# Altium PCB DesafioHardware.PcbDoc
Units mm, origin at the board's own origin, x right, y up, seen from the top; angles counter-clockwise.
Board outline 104 x 72.5 mm, 2 copper layers (Top Layer, Bottom Layer); 27 components, 23 nets, 140 pads, 77 vias.
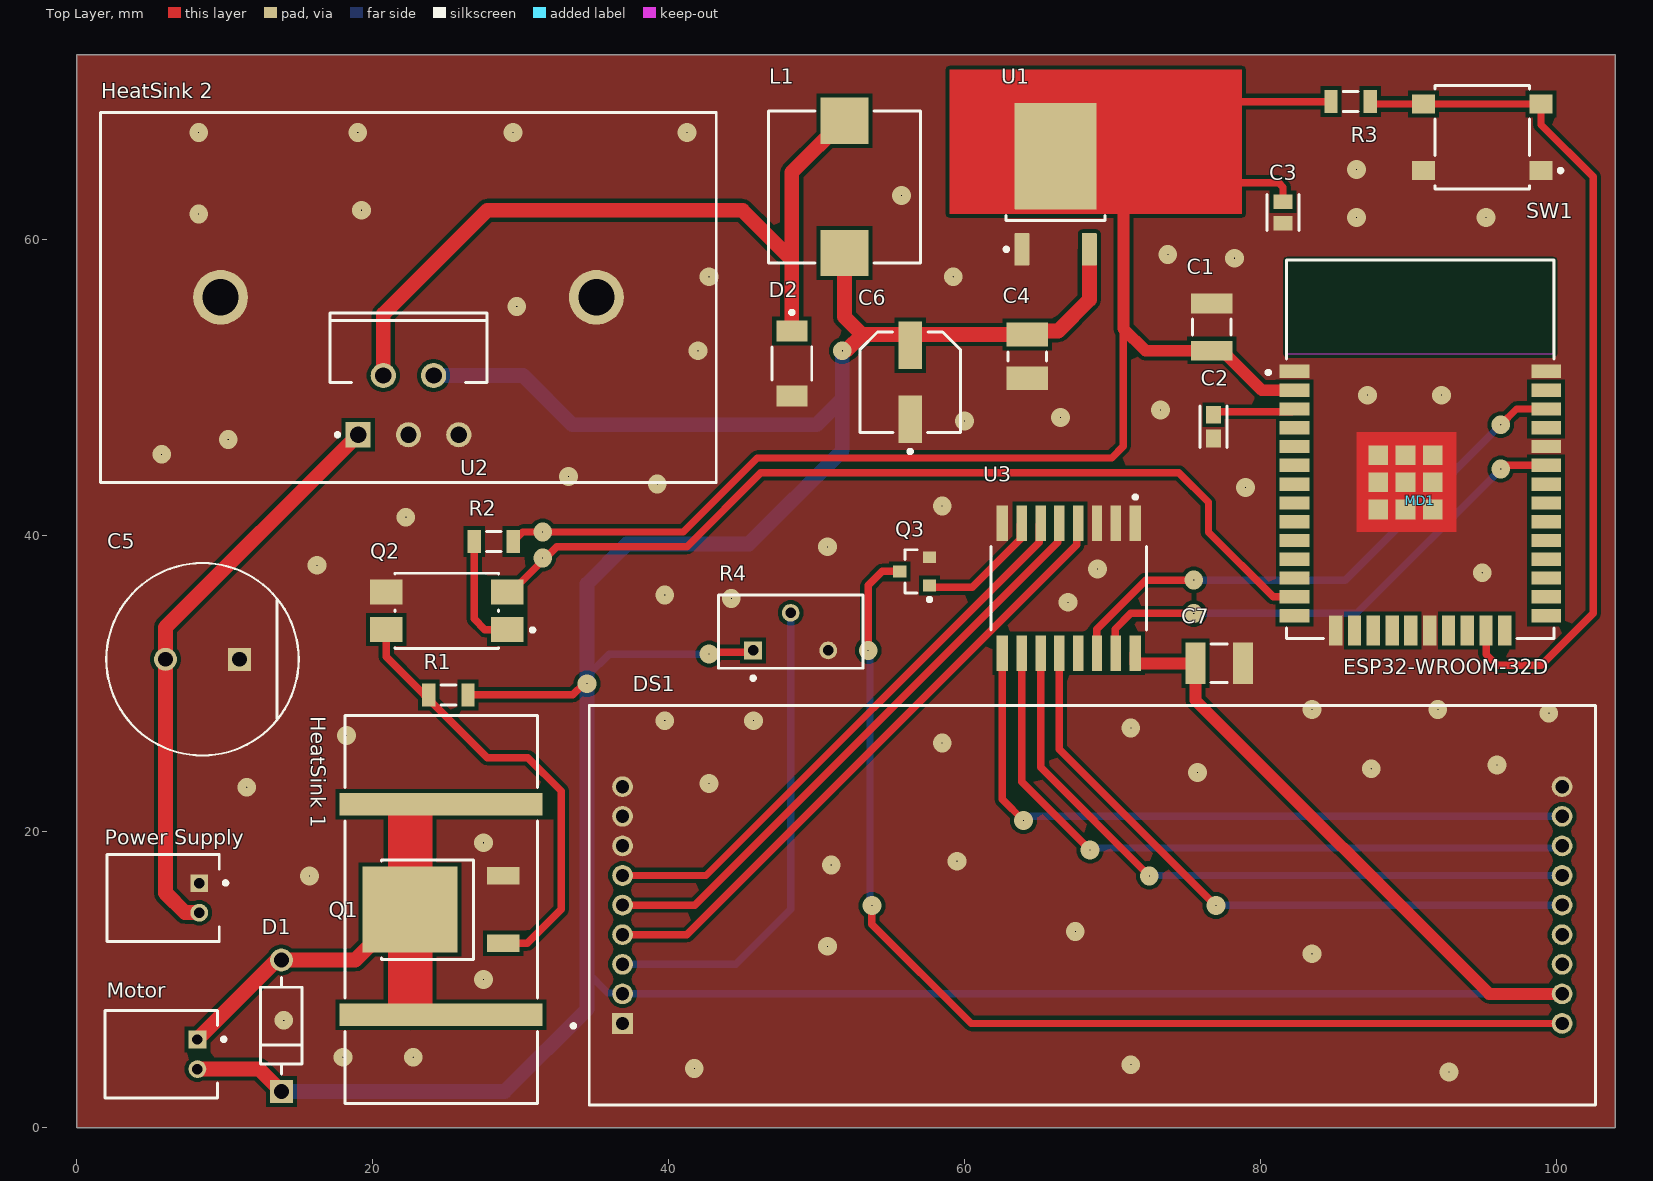
[diagram p0: Top Layer view]
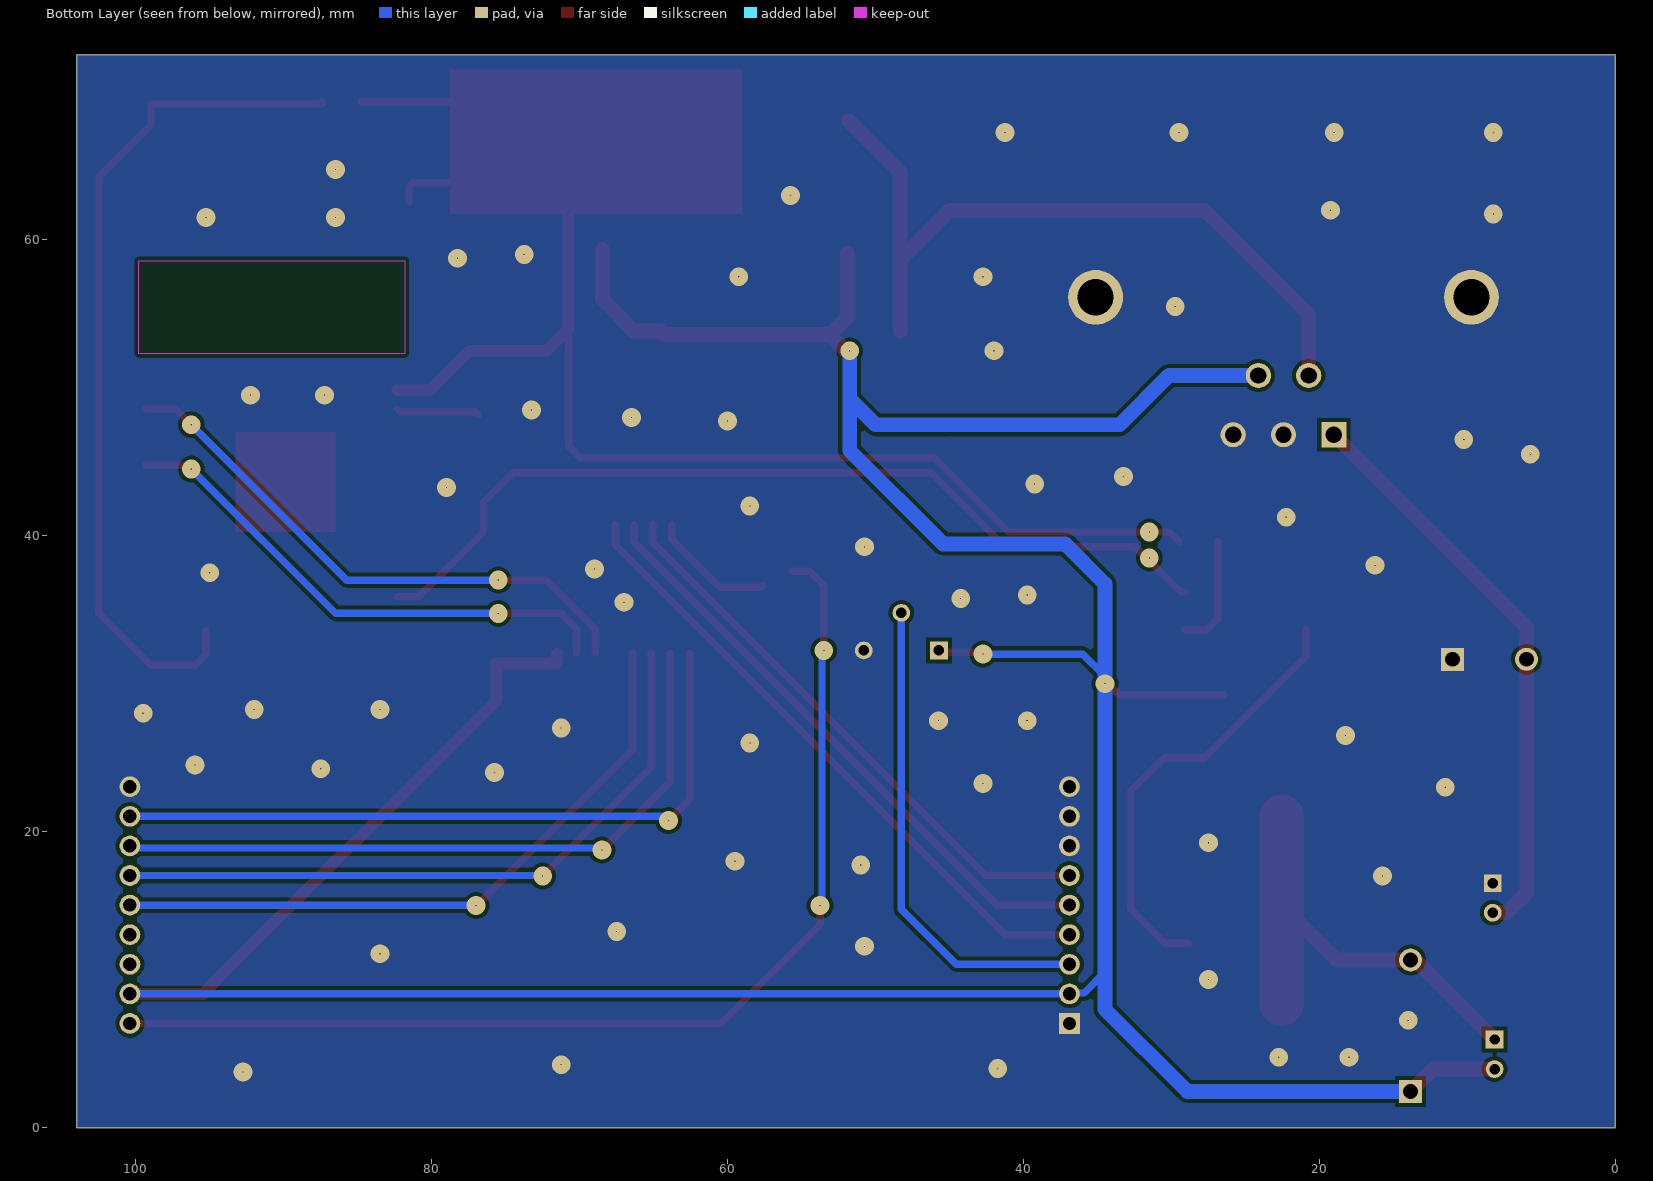
[diagram p1: Bottom Layer view, seen from below]
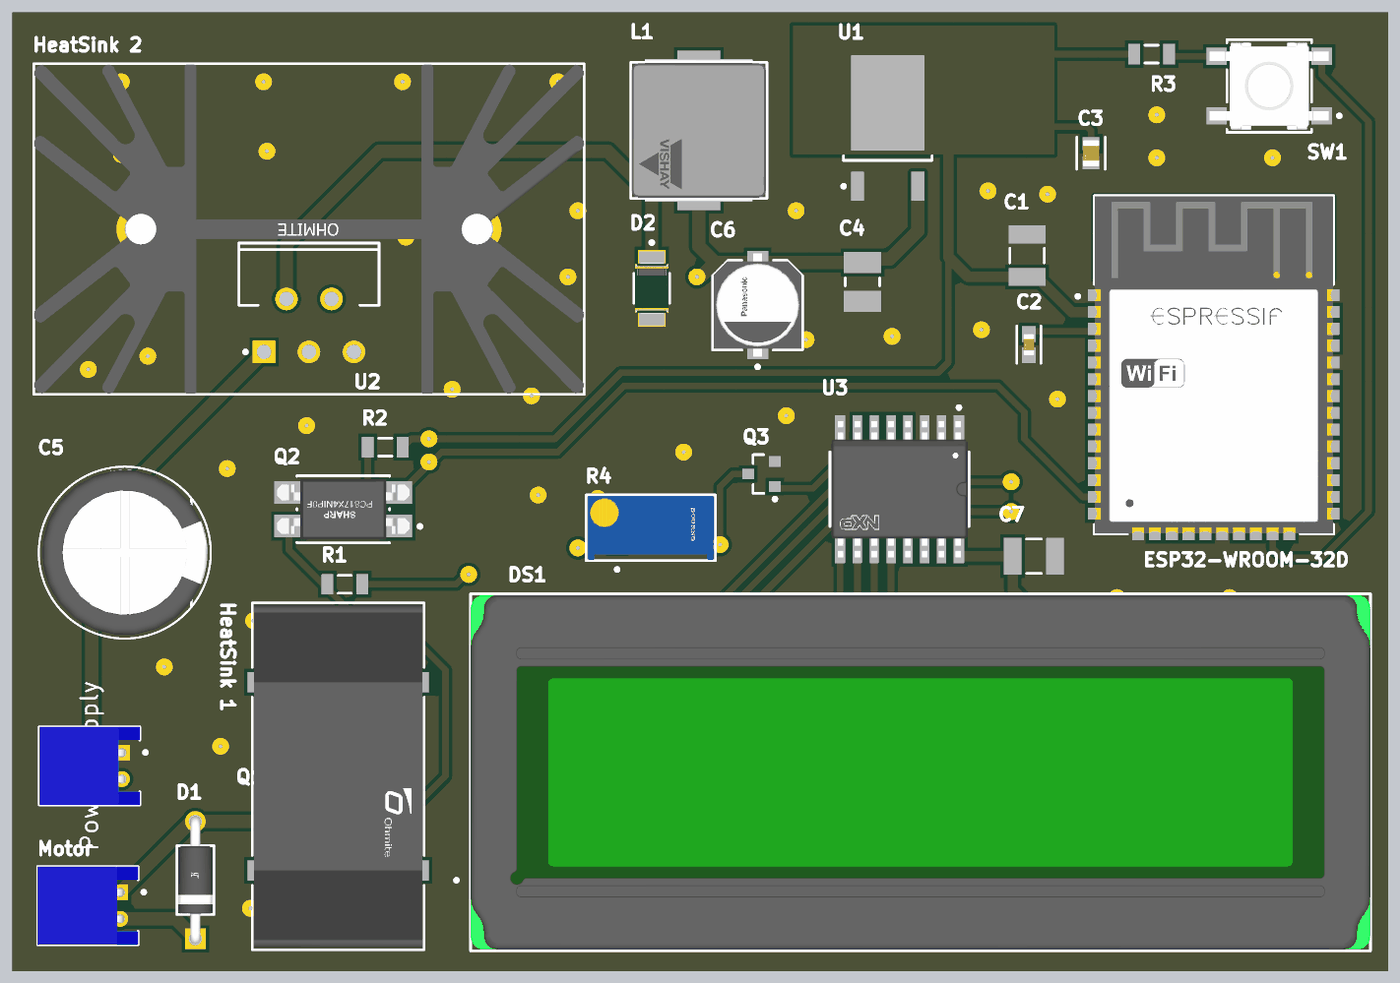
[diagram p2: 3D render of the assembled board from above, using the file's embedded part models]

## Layer stack, top to bottom
Top Solder: solder mask 0.0102, Solder Resist, Dk 3.5
Top Layer: signal copper 0.0356
Dielectric 1: dielectric 0.32, FR-4, Dk 4.8
Bottom Layer: signal copper 0.0356
Bottom Solder: solder mask 0.0102, Solder Resist, Dk 3.5

## Board outline
0,0 104,0 104,72.5 0,72.5

## Design rules (kind name [scope] priority, off if disabled: settings)
Clearance [All] p1: gap=0.254 ignorepadtopadclearanceinfootprint=FALSE
PolygonConnect [All] p1: connectstyle=Direct reliefconductorwidth=0.254 reliefentries=4 polygonreliefangle="90 Angle" airgapwidth=0.254
RoutingVias [All] p1: holewidth=0.711 width=1.27 viastyle="Through Hole" minholewidth=0.711 minwidth=1.27 maxholewidth=0.711 maxwidth=1.27
SolderMaskExpansion [InComponent('HeatSink 2')] p1: expansion=0.102 istentingtop=FALSE soldermaskfromhole=TRUE
SupplyNets "Schematic Supply Nets_3" [InNet('5V')] p1: voltage=0.000
SupplyNets "Schematic Supply Nets_2" [InNet('3.3V')] p2: voltage=0.000
SupplyNets "Schematic Supply Nets_1" [InNet('GND')] p3: voltage=0.000
SupplyNets "Schematic Supply Nets" [InNet('36V')] p4: voltage=0.000
Width [All] p1: maxlimit=3 minlimit=0.3 preferedwidth=0.8 minimp=50.000000 maximp=50.000000 favimp=50.000000
30 further rules are at their usual default settings.

## Components (designator, comment, footprint, x,y, rotation, side; value= is the part's Value field where it differs from the comment)
C1 "CAP 100nF" CAPC1210(3225)170_M 76.708,54.102 r270 top value=100nF
C2 "10uF" FP-GRM188-0_1-e0_2_0_55-IPC_A 76.835,47.371 r270 top
C3 "10uF 16V" FP-GRM21B-0_1-IPC_C 81.534,61.849 r270 top
C4 "4.7uF 25V" CAPC1210(3225)220_M 64.262,52.119 r270 top value=4.7uF
C5 "680uF 50V" FP-RAD-TH-D_12_5_0_5-L_30-MFG 8.509,31.648 r180 top
C6 "220uF 16V" FP-FKD8-MFG 56.337,50.368 r90 top
C7 "CAP 100nF" CAPC1210(3225)170_M 77.216,31.369 r180 top value=100nF
D1 "1N4007" FP-1N4007-MFG 13.843,6.883 r90 top value=15pF
D2 "PMEG3050EP" FP-SOD128-MFG 48.336,51.638 r270 top
DS1 "EA DIP162-DHNLED" FP-EA_DIP162-DHNLED-MFG 68.648,15.037 r0 top
"HeatSink 1" "DA-T263-201E-TR" FP-DA-T263-201E-TR-MFG 24.638,14.732 r270 top
"HeatSink 2" "FA-T220-38E" FP-FA-T220-38E-MFG 22.43,56.109 r180 top
L1 "33uH 3.7A" FP-IHLP-4040DZ-FP_3_124x3-MFG 51.892,63.576 r270 top
MD1 "ESP32-WROOM-32D" FP-ESP32-WROOM-32D-MFG 90.813,45.847 r0 top
Motor "S2B-PH-K-S(LF)(SN)" JST-S2B-PH-K-S_V 5.715,4.953 r270 top
"Power Supply" "S2B-PH-K-S(LF)(SN)" JST-S2B-PH-K-S_V 5.842,15.519 r270 top
Q1 "IPD60R1K5CE" FP-PG-TO252-3-MFG 23.713,14.732 r90 top
Q2 "PC817" FP-PC817X4NIP0F-MFG 25.019,34.925 r180 top
Q3 "MMBT5550LT1G" ONSC-SOT-23-3-318-08_V 56.642,37.592 r180 top
R1 "10K" RESC3216X70X50LL05T20 25.131,29.25 r0 top
R2 "220R" RESC3216X70X50LL05T20 28.194,39.624 r0 top
R3 "220R" RESC3216X70X50LL05T20 86.106,69.342 r180 top
R4 "3296Y-1-103LF" FP-3296Y-MFG 48.26,33.523 r270 top
SW1 "B3S-1000P" FP-B3S-1000P-MFG 94.996,66.929 r180 top
U1 "LM1117-3.3" NDP0003B_M 66.167,63.754 r90 top
U2 "LM2596T-5.0/NOPB" NDH0005A 22.43,48.825 r0 top
U3 "PCF8574T/3,518" FP-SOT162-1-MFG 67.056,36.449 r270 top

## Footprints (in the part's own frame and the unit in brackets; to place one, negate y for a bottom-side part, rotate by r counter-clockwise, add the part's x,y. Pads: shape width x height; smd on the part's side, far side on the other; paste and mask are expansions set on the pad)
CAPC1210(3225)170_M [mm] "Chip Capacitor, Body 3.2x2.5mm, Height 1.7mm, IPC Low Density"
  rect 1.35x2.8 smd: 1(-1.6,0) 2(1.6,0)
  silkscreen extent -0.55,-1.3 0.55,1.3, body extent -1.7,-1.35 1.7,1.35, height 1.7
CAPC1210(3225)220_M [mm] "Chip Capacitor, Body 3.2x2.5mm, Height 2.2mm, IPC Low Density"
  rect 1.6x2.8 smd: 1(-1.475,0) 2(1.475,0)
  silkscreen extent -0.3,-1.3 0.3,1.3, body extent -1.7,-1.35 1.7,1.35, height 2.2
FP-1N4007-MFG [mm]
  rect 1.55x1.55 hole 1 paste-2539.97 mask+0: 1(-4.44,0)
  round 1.55 hole 1 paste-2539.97 mask+0: 2(4.44,0)
  silkscreen extent -3.27,-1.4 3.27,1.4, body extent -5.32,-1.5 5.32,1.5, height 0.25
FP-3296Y-MFG [mm]
  rect 1.2x1.2 hole 0.7 paste-2539.97 mask+0: 1(1.275,-2.54)
  round 1.2 hole 0.7 paste-2539.97 mask+0: 2(-1.265,0) 3(1.275,2.54)
  silkscreen extent -2.48,-4.89 3.27,4.89, body extent -2.58,-4.99 2.58,4.99, height 0.25
FP-B3S-1000P-MFG [mm]
  rect 1.55x1.3 smd paste+0 mask+0: 1(-3.975,2.25) 2(3.975,2.25) 3(-3.975,-2.25) 4(3.975,-2.25)
  silkscreen extent -5.43,-3.5 3.2,3.5, body extent -4.85,-3.6 4.85,3.6, height 0.25
FP-DA-T263-201E-TR-MFG [mil]
  rect 60x540 smd paste+0 mask+0: 1(-280,0) 2(280,0)
  silkscreen extent -516,-256 516,256, body extent -520,-274 520,274, height 10
FP-EA_DIP162-DHNLED-MFG [mm]
  rect 1.4x1.4 hole 0.9 paste-2539.97 mask+0: 1(-31.75,-8)
  round 1.4 hole 0.9 paste-2539.97 mask+0: 2(-31.75,-6) 3(-31.75,-4) 4(-31.75,-2) 5(-31.75,0) 6(-31.75,2) 7(-31.75,4) 8(-31.75,6) 9(-31.75,8) 10(31.75,8) 11(31.75,6) 12(31.75,4) 13(31.75,2) 14(31.75,0) 15(31.75,-2) 16(31.75,-4) 17(31.75,-6) 18(31.75,-8)
  silkscreen extent -35.2,-13.5 34,13.5, body extent -34.1,-13.6 34.1,13.6, height 0.25
FP-ESP32-WROOM-32D-MFG [mm]
  rect 2x0.9 smd paste+0 mask+0: 1(-8.5,5.26) 2(-8.5,3.99) 3(-8.5,2.72) 4(-8.5,1.45) 5(-8.5,0.18) 6(-8.5,-1.09) 7(-8.5,-2.36) 8(-8.5,-3.63) 9(-8.5,-4.9) 10(-8.5,-6.17) 11(-8.5,-7.44) 12(-8.5,-8.71) 13(-8.5,-9.98) 14(-8.5,-11.25) 25(8.5,-11.25) 26(8.5,-9.98) 27(8.5,-8.71) 28(8.5,-7.44) 29(8.5,-6.17) 30(8.5,-4.9) 31(8.5,-3.63) 32(8.5,-2.36) 33(8.5,-1.09) 34(8.5,0.18) 35(8.5,1.45) 36(8.5,2.72) 37(8.5,3.99) 38(8.5,5.26)
  rect 0.9x2 smd paste+0 mask+0: 15(-5.715,-12.25) 16(-4.445,-12.25) 17(-3.175,-12.25) 18(-1.905,-12.25) 19(-0.635,-12.25) 20(0.635,-12.25) 21(1.905,-12.25) 22(3.175,-12.25) 23(4.445,-12.25) 24(5.715,-12.25)
  rect 1.33x1.33 smd paste+0 mask+0: 39(-2.835,-4.075) 39(-2.835,-2.24) 39(-2.835,-0.405) 39(-1,-4.075) 39(-1,-2.24) 39(-1,-0.405) 39(0.835,-4.075) 39(0.835,-2.24) 39(0.835,-0.405)
  Keep-Out Layer region: -9,6.45 9,6.45 9,12.75 -9,12.75
  Keep-Out Layer region: -9,6.45 9,6.45 9,12.75 -9,12.75
  silkscreen extent -10.4,-12.8 9.05,12.8, body extent -9.6,-13.35 9.6,12.9, height 0.25
FP-FA-T220-38E-MFG [mm]
  round 3.7 hole 2.45 paste-2539.97 mask+0: 1(-12.7,0) 1(12.7,0)
  silkscreen extent -20.8,-12.5 20.8,12.5, body extent -20.9,-12.6 20.9,12.6, height 0.25
FP-FKD8-MFG [mm]
  rect 3.2x1.6 smd paste+0 mask+0: 1(-2.5,0) 2(2.5,0)
  silkscreen extent -4.8,-3.4 3.4,3.4, body extent -4.35,-3.65 4.35,3.65, height 0.25
FP-GRM21B-0_1-IPC_C [mm]
  rect 0.958x1.262 smd paste+0 mask+0: 1(-0.727,0) 2(0.727,0)
  silkscreen extent -1.21,-1.07 1.21,1.07, body extent -1.31,-0.77 1.31,0.77, height 0.25
FP-GRM188-0_1-e0_2_0_55-IPC_A [mm]
  rect 1.208x1.012 smd paste+0 mask+0: 1(-0.802,0) 2(0.802,0)
  silkscreen extent -1.41,-0.91 1.41,0.91, body extent -1.91,-1.01 1.91,1.01, height 0.25
FP-IHLP-4040DZ-FP_3_124x3-MFG [mm]
  rect 3.124x3.251 smd paste+0 mask+0: 1(-4.471,0) 2(4.471,0)
  silkscreen extent -5.14,-5.14 5.14,5.14, body extent -6.13,-5.24 6.13,5.24, height 0.25
FP-PC817X4NIP0F-MFG [mm]
  rect 2.2x1.7 smd paste+0 mask+0: 1(-4.1,1.27) 2(-4.1,-1.27) 3(4.1,-1.27) 4(4.1,1.27)
  silkscreen extent -5.93,-2.54 3.5,2.54, body extent -5.3,-2.64 5.3,2.64, height 0.25
FP-PG-TO252-3-MFG [mm]
  rect 1.2x2.2 smd paste-1000 mask+0: 1(-2.28,-5.125) 3(2.28,-5.125)
  rect 5.8x6.4 smd paste-1000 mask+0: 4(0,1.175)
  silkscreen extent -3.36,-3.11 3.36,3.11, body extent -3.46,-6.32 3.46,4.47, height 0.25
FP-RAD-TH-D_12_5_0_5-L_30-MFG [mm]
  rect 1.55x1.55 hole 1 paste-2539.97 mask+0: 1(-2.5,0)
  round 1.55 hole 1 paste-2539.97 mask+0: 2(2.5,0)
  silkscreen extent -6.5,-6.5 6.5,6.5, body extent -6.6,-6.6 6.6,6.6, height 0.25
FP-SOD128-MFG [mm]
  rect 1.4x2.1 smd paste-1000 mask+0: 1(-2.2,0) 2(2.2,0)
  silkscreen extent -3.57,-1.35 1.13,1.35, body extent -3.1,-1.7 3.1,1.7, height 0.25
FP-SOT162-1-MFG [mm]
  rect 2.4x0.8 smd paste+0 mask+0: 1(-4.4,4.495) 8(-4.4,-4.495) 9(4.4,-4.495) 16(4.4,4.495)
  rect 2.4x0.7 smd paste+0 mask+0: 2(-4.4,3.175) 3(-4.4,1.905) 4(-4.4,0.635) 5(-4.4,-0.635) 6(-4.4,-1.905) 7(-4.4,-3.175) 10(4.4,-3.175) 11(4.4,-1.905) 12(4.4,-0.635) 13(4.4,0.635) 14(4.4,1.905) 15(4.4,3.175)
  silkscreen extent -6.29,-5.25 2.82,5.25, body extent -5.72,-5.95 5.72,5.95, height 0.25
JST-S2B-PH-K-S_V [mm] "THD, 2-Leads, Body 7.6x5.9mm, Pitch 2mm"
  rect 1.2x1.2 hole 0.7: 1(-1,2.45)
  round 1.2 hole 0.7: 2(1,2.45)
  silkscreen extent -2.95,-3.8 2.95,4.35, body extent -2.95,-3.8 2.95,3.8, height 4.8
NDH0005A [mm] "FM, 5-Leads, Body 10.6x4.7mm, Pitch 1.7mm"
  rect 1.7x1.7 hole 1.1: 1(-3.4,-2)
  round 1.7 hole 1.1: 2(-1.7,2) 3(0,-2) 4(1.7,2) 5(3.4,-2)
  silkscreen extent -5.3,-2.12 5.3,6.23, body extent -5.35,-2.31 5.35,6.28, height 21.1
NDP0003B_M [mm] "D-PAK, 4-Leads, Body 6.1x6.6mm, Pitch 2.29mm, Lead Span 9.7mm, IPC Low Density"
  rrect10% 2.2x1 smd: 1(-4.4,2.28) 3(-4.4,-2.28)
  rrect2% 7.2x5.55 smd: 4(1.9,0)
  silkscreen extent -4.52,-3.35 -2.1,3.45, body extent -2.45,-3.35 3.75,3.35, height 2.38
ONSC-SOT-23-3-318-08_V [mm] "SOT23, 3-Leads, Body 2.92x1.3mm, Pitch 0.95mm"
  rect 0.9x0.8 smd: 1(-1,0.95) 2(-1,-0.95) 3(1,0)
  silkscreen extent -1.13,-1.46 0.65,2.02, body extent -0.65,-1.46 0.65,1.46, height 1.11
RESC3216X70X50LL05T20 [mm] "Chip Resistor, 2-Leads, Body 3.20x1.60mm, IPC High Density"
  rect 0.9x1.55 smd: 1(-1.325,0) 2(1.325,0)
  silkscreen extent -0.5,-0.67 0.5,0.67, body extent -1.63,-0.82 1.62,0.82, height 0.7

## Part data
C1 C7: library part CMP-1038-01664-1, "CAP 100nF 100V ±5% 1210 (3225 Metric) Thickness 1.7mm SMD", Case-EIA=1210, Case-Metric=3225, Rated Voltage="100 V", Tolerance=Â±5%, Max Thickness="1.7 mm", Technology=SMT
C2: library part CMP-2006-02792-2, "Chip Multilayer Ceramic Capacitors for General Purpose, 0603, 10uF, X5R, 15%, 20%, 6.3V", Case Code (Imperial)=0603, Case Code (Metric)=1608, Dielectric=X5R, Max Operating Temperature=85°C, Min Operating Temperature=-55°C, Package Quantity=4000, Tolerance=20%, Voltage=6.3V, Capacitance=10uF, Case/Package=0603, Depth=0.8mm, Height=0.8mm, Lead Free="Lead Free", Length=1.6mm, Material=Ceramic, Mount="Surface Mount", Packaging="Tape and Reel", Radiation Hardening=No, REACH SVHC="No SVHC", Termination=SMD/SMT, Thickness=0.035inch, Voltage Rating=6.3V, Voltage Rating (DC)=6.3V, Width=0.031inch
C3: library part CMP-2007-03453-2, "Chip Multilayer Ceramic Capacitors for General Purpose, 0805, 10uF, X5R, 15%, 10%, 16V", Capacitance=10uF, Case Code (Imperial)=0805, Case Code (Metric)=2012, Dielectric=X5R, Max Operating Temperature=85°C, Min Operating Temperature=-55°C, Package Quantity=1, Tolerance=10%, Voltage=16V, Case/Package=0805, Depth=1.25mm, Height=1.25mm, Lead Free="Lead Free", Length=2mm, Material=Ceramic, Mount="Surface Mount", Packaging="Tape and Reel", Radiation Hardening=No, REACH SVHC="No SVHC", Termination=SMD/SMT, Thickness=0.053inch, Voltage Rating=16V, Voltage Rating (DC)=16V, Width=1.25mm
C4: library part CMP-1038-02151-2, "CAP 4.7uF 25V ±10% 1210 (3225 Metric) Thickness 2.2mm SMD", Case-EIA=1210, Case-Metric=3225, Rated Voltage="25 V", Tolerance=Â±10%, Max Thickness="2.2 mm", Technology=SMT
C5: library part CMP-05427-000465-1, "Aluminum Electrolytic Capacitors (Radial Lead Type) 680uF ±20% 50V"
C6: library part CMP-05427-000071-1, "CAP ALUM 220UF 20% 16V SMD", Capacitance=220uF, Case/Package=Radial, ESR (Equivalent Series Resistance)=340mR, Leakage Current=3uA, Max Operating Temperature=105°C, Min Operating Temperature=-55°C, Package Quantity=900, Ripple Current=280mA, Tolerance=20%, Voltage=16V, Construction=Cylindrical, Contact Plating=Tin, Diameter=6.3mm, Height=7.7mm, Height - Seated (Max)=0.315inch, Impedance=340mR, Lead Free="Lead Free", Length=7.7mm, Life (Hours)=2000Hour, Material=Aluminium, Mount="Surface Mount", Number of Pins=8, Packaging="Tape and Reel", Polarity=Polar, Radiation Hardening=No, REACH SVHC="No SVHC", Ripple Current (AC)=280mA, RoHS Compliant=Yes, Series=FK, Termination=SMD/SMT, Voltage Rating=16V, Voltage Rating (DC)=16V, Width=8.3mm
D1: library part CMP-123542-000001-1, "Rectifier diode 1000 V 1 A DO-41, ,", Capacitance=15pF, Forward Current=1A, Manufacturer=Diotec, Max Junction Temp=+175°C, Max Repetitive Reverse Voltage=1000V, Max Surge Forward Current=27A, Peak Reverse Current=5uA, Temperature="-50°C to +175°C", Temperature Range Low=-50°C, Automotive=No, Category=Diode, ComponentLink2Description=Datasheet, ComponentLink2URL=https://datasheet.octopart.com/1N4007-Diotec-datasheet-62346875.pdf, Device Class L1="Discrete Semiconductors", Device Class L2=Diodes, Device Class L3="Rectifier Diodes", Height=2.8mm, Ipc Land Pattern Name=DIOAD888W100L520D280, Lead Free=Yes, Manufacturer Part Number=1N4007, Octopart=https://octopart.com/1n4007-diotec-4040411, Package=1N4007, Reverse Voltage=1000V, RoHS=TRUE, Temperature Range High=+175°C
D2: library part CMP-14398-000051-1, "DIODE SCHOTTKY 30V 5A SOD128", RoHS Compliant=Yes
DS1: library part CMP-140401-000001-1, "LCD MOD CHAR 2X16 Y/G BACKLIT", Colour=Yellow/Green, Manufacturer="Display Visions", Max Supply Voltage=5V, Min Supply Voltage=2.7V, Temperature="-20°C to +70°C", Temperature Range High=+70°C, Temperature Range Low=-20°C, Automotive=No, Category=Disp, ComponentLink2Description=Datasheet, ComponentLink2URL=https://www.lcd-module.de/fileadmin/eng/pdf/doma/dip162-de.pdf, Device Class L1=Optoelectronics, Device Class L2=Displays, Device Class L3=LCD, Digikey Description="LCD MOD CHAR 2X16 Y/G BACKLIT", Display Type=LCD, Height=11mm, Interface=Parallel, Lead Free=Yes, Manufacturer Part Number="EA DIP162-DHNLED", Number Of Characters=32, Octopart=https://octopart.com/ea+dip162-dhnled-display+visions-99339882, Package="EA DIP162-DHNLED", RoHS=TRUE
"HeatSink 1": library part CMP-33535-000006-1, "HEATSINK FOR TO-263", Case/Package=TO-252, Color=Black, Natural Thermal Resistance=8°C/W, Package Cooled=TO-263, Package Quantity=200, Height=12.1mm, Height Off Base=0.48inch, Length=25.9mm, Material=Aluminium, Mount="Solderable Feet", Packaging="Tape and Reel", Shape=Fins, Thermal Resistance @ Forced Air Flow (100 LFM)=8°C/W, Type=Passive, Width=12.7mm
"HeatSink 2": library part CMP-33535-000020-1, "HEATSINK TO-218,TO-220,TO-247", Case/Package=TO-220, Color=Black, Natural Thermal Resistance=3.8°C/W, Package Quantity=10, Thermal Resistance @ Forced Air Flow (100 LFM)=1.5°C/W, Finish=Anodized, Height=38.1mm, Height Off Base=0.984inch, Length=41.6mm, Material=Aluminium, Mount=Bolt, Package Cooled=TO-220, Packaging=Bulk, RoHS Compliant=Yes, Series=F, Shape=Fins, Type=Passive, Weight=27g, Width=25mm
L1: library part CMP-02424-000211-1, "Automotive Inductors, High Temperature (155 °C) Series 33uH 3.7A 117.7mΩ 20%", Case/Package=4040, Current Rating=3.7A, DC Resistance (DCR)=117.7mR, Inductance=33uH, Max DC Current=4.2A, Max Operating Temperature=125°C, Min Operating Temperature=-55°C, Package Quantity=500, Test Frequency=100kHz, Tolerance=20%, Depth=10.3mm, Height=4mm, Height - Seated (Max)=0.158inch, Lead Free="Lead Free", Length=0.425inch, Military Standard=Not, Mount="Surface Mount", Packaging="Tape and Reel", Saturation Current=4.2A, Shielding=Shielded, Termination=SMD/SMT, Width=0.405inch
MD1: library part CMP-194065-000003-1, "WIFI MODULE 32MBITS SPI FLASH", Manufacturer="Espressif Systems", Max Frequency=2484MHz, Max Supply Voltage=3.6V, Min Supply Voltage=3V, Nominal Supply Current=500mA, Temperature="-40°C to +85°C", Temperature Range High=+85°C, Temperature Range Low=-40°C, Automotive=No, Bandwidth=72MHz, Category=UNK, ComponentLink2Description=Datasheet, ComponentLink2URL=https://www.espressif.com/sites/default/files/documentation/esp32-wroom-32d_esp32-wroom-32u_datasheet_en.pdf, Data Rate=150Mbits/s, Device Class L1="Integrated Circuits (ICs)", Device Class L2="RF Semiconductors and Devices", Device Class L3=Transceivers, Digikey Description="WIFI MODULE 32MBITS SPI FLASH", Height=3.2mm, Interface=I2C,SPI,UART,Ethernet,I2S,Other, Lead Free=Yes, Manufacturer Part Number=ESP32-WROOM-32D, Mouser Description="Wi-Fi/BT BLE Module ESP32-D0WD, SPI Flash, UART, P", Number Of Adc Channels=16, Number Of Gpio=32, Octopart=https://octopart.com/esp32-wroom-32d-espressif+systems-91040050, Package=ESP32-WROOM-32D, RoHS=TRUE, Sensitivity=-98dBm
Motor "Power Supply": library part CMP-1755-00004-1, "Male Header, Pitch 2 mm, 1 x 2 Position, Height 4.8 mm, Tail Length 3.4 mm, -25 to 85 degC, RoHS, Bulk", Capacitance="10 uF", Case\Package=Radial, Max Operating Temperature="85 degC", Min Operating Temperature="-40 degC", Package Quantity=200, Tolerance=20%, Voltage Rating="50 V", ComponentLink1Description=Datasheet, ComponentLink1URL=http://www.jst-mfg.com/product/pdf/eng/ePH.pdf, DatasheetVersion=Dec-12, Diameter="5 mm", Height="11 mm", Lead Pitch="2 mm", Length="11 mm", Mount="Through Hole", PackageDescription="Male Header, Pitch 2 mm, 1 x 2 Position, Height 4.8 mm, Tail Length 3.4 mm", PackageReference=S2B-PH-K-S, Packaging=Bulk, Pins=2, Radiation Hardening=No, REACH SVHC="No SVHC", RoHSCompliant=true, Voltage Rating (DC)="50 V"
Q1: library part CMP-32901-001299-1, "MOSFET N-CH 650V 5A TO252", Drain to Source Voltage (Vdss)=600V, Max Operating Temperature=150°C, Min Operating Temperature=-40°C, Halogen Free="Halogen Free", Lead Free="Contains Lead", Max Dual Supply Voltage=600V, Mount="Surface Mount", RoHS Compliant=Yes
Q2: library part CMP-65434-000001-1, "OPTOISOLATOR 5KV TRANS 4SMD", Collector Emitter Voltage=80V, Emiiter Collector Voltage=6V, Forward Current=20mA, Forward Voltage=1.2V, Isolation Voltage=5kVrms, Manufacturer=Sharp, Manufacturer Part Number=PC817X4NIP0F, Max Current Transfer Ratio=600%, Min Current Transfer Ratio=50%, Power Dissipation=200mW, Temperature="-30°C to +100°C", Temperature Range High=+100°C, Temperature Range Low=-30°C, Automotive=No, Category=Trans, ComponentLink2Description=Datasheet, ComponentLink2URL=https://www.sharpsde.com/fileadmin/products/Optoelectronics/Isolation%20Devices/Specs%20Photocoupler/PC817XxNIP0F_17Jun08_Spec_ED-04P129A.pdf, Device Class L1=Optoelectronics, Device Class L2=Optocouplers, Device Class L3=unset, Digikey Description="OPTOISOLATOR 5KV TRANS 4SMD", Height=4.6mm, Lead Free=Yes, Mouser Description="Transistor Output Optocouplers Photocoupler 300-600% CRT", Octopart=https://octopart.com/pc817x4nip0f-sharp-20650453, Package=PC817X4NIP0F, Reverse Voltage=6V, RoHS=TRUE, Standoff Height=0.1mm
Q3: library part CMP-1048-00659-1, "High Voltage Transistor, NPN Silicon, 3-Pin SOT-23, Pb-Free, Tape and Reel", Manufacturer="On Semiconductor", ComponentLink1Description="Manufacturer URL", ComponentLink1URL=http://www.onsemi.com/, ComponentLink2Description=Datasheet, ComponentLink2URL=http://www.onsemi.cn/pub_link/Collateral/MMBT5550LT1-D.PDF, ComponentLink3Description="Package Specification", ComponentLink3URL=http://www.onsemi.cn/pub_link/Collateral/318-08.PDF, DatasheetVersion="Rev. 10", IC Continuous (A)=0.6, Mounting Technology="Surface Mount", PackageDescription="3-Pin Small Outline Transistor, Body 2.92 x 1.3 mm, Pitch 0.95 mm", PackageReference=SOT-23-3-318-08, PackageVersion="Rev. AP, 11/2009", Packing="Tape and Reel", PartNumber=MMBT5550LT1G, Polarity=NPN, RoHS=TRUE
R1 R2 R3: library part CMP-2003-00388-1, Manufacturer=Panasonic, Part Number=ERJ8ENF4700V
R4: library part CMP-07234-000015-2, "TRIMMER 10K OHM 0.5W PC PIN TOP", Color=Blue, Insulation Resistance=1GR, Manufacturer Series=3296, Max Operating Temperature=125°C, Max Power Dissipation=500mW, Min Operating Temperature=-55°C, Package Quantity=50, Resistance=10kR, Resistance Law=Linear, Resistance Tolerance=10%, Resistor Type=Cermet, Temperature Coefficient=100ppm/°C, Actuator Orientation=Vertical, Actuator Type=SCREW, Depth=4.83mm, Height=0.395inch, Lead Free="Lead Free", Length=9.53mm, Military Standard=Not, Mount=Panel, Number of Pins=3, Number of Terminals/Pins=3, Number of Turns=25, Packaging=Rail/Tube, Power Rating=500mW, Radiation Hardening=No, REACH SVHC="No SVHC", RoHS Compliant=Yes, Series=3296, Taper=Linear, Technology=CERMET, Terminal Finish=Tin, Termination=Pin, Tolerance=10%, Type=Potentiometer, Weight=0.03oz, Width=9.53mm
SW1: library part CMP-08834-000008-1, "SWITCH TACTILE SPST-NO 0.05A 24V", Contact Current Rating=50mA, Contact Resistance=100mR, Max Operating Temperature=70°C, Max Voltage Rating (DC)=24V, Min Operating Temperature=-25°C, Operating Force=1.57N, Package Quantity=1, Ratings=IP67, Actuator Length=0.8mm, Actuator Type=Standard, Contact Material=Bronze, Contact Plating=Silver, Current Rating=50mA, Depth=9mm, Electrical Life=500000Cycles, Height=3.65mm, Illumination Type=Non-Illuminated, Lead Free="Lead Free", Length=6.6mm, Max Current Rating=50mA, Mechanical Life=500000Cycles, Mount="Surface Mount", Number of Poles=1, Orientation=Straight, Packaging="Tape and Reel", Radiation Hardening=No, REACH SVHC="No SVHC", Switch Function=Off-Mom, Switch Travel=0.25mm, Termination="Gull Wing", Throw Configuration=SPST, Voltage Rating (DC)=24V, Weight=0.010582oz, Width=6mm
U1: library part CMP-0062-00703-3, "800mA Low-Dropout Linear Regulator, 3-pin TO-252, Pb-Free", Manufacturer="Texas Instruments", PackageTopMarking=NSUZXYTT*LM1117*DT-3.3, PowerWise=N, Code_JEDEC=TO-252-AA, ComponentLink1Description="Datasheet URL", ComponentLink1URL=http://www.ti.com/general/docs/lit/getliterature.tsp?genericPartNumber=LM1117-N&fileType=pdf, CompType="LDO IC", PackageDescription="TO252, Molded, Jedec, 6.8 x 6.10 x 2.30mm Body, 3 Lead, 2.28mm Pitch, Surface Mount", PackageReference=NDP0003B, PinCount=3, RoHS=Y
U2: library part CMP-0069-01926-3, "SIMPLE SWITCHER® Power Converter 150 KHz 3A Step-Down Voltage Regulator, 5-pin TO-220, Pb-Free", Manufacturer="Texas Instruments", PackageTopMarking="NSUZXYTTE#*LM2596T*-5.0 P+", PowerWise=N, ComponentLink1Description="Datasheet URL", ComponentLink1URL=http://www.ti.com/general/docs/lit/getliterature.tsp?genericPartNumber=LM2596&fileType=pdf, CompType=Switcher, PackageDescription="TO-220, Molded, Stagger Bend, 5 Lead", PackageReference=NDH0005A, PinCount=5, RoHS=Y
U3: library part CMP-10112-000010-1, "IC I/O EXPANDER I2C 8B 16SOIC", Ambient Temperature Range High=+85°C, Ambient Temperature Range Low=-40°C, Frequency=100kHz, Manufacturer="NXP Semiconductors", Max Junction Temp=+125°C, Max Supply Voltage=6V, Min Supply Voltage=2.5V, Nominal Supply Current=40uA, Package=SOT162-1, Temperature="-40°C to +85°C", Automotive=No, Category=IC, ComponentLink2Description=Datasheet, ComponentLink2URL=https://www.nxp.com/docs/en/data-sheet/PCF8574_PCF8574A.pdf, Device Class L1="Integrated Circuits (ICs)", Device Class L2="Interface ICs", Device Class L3="I/O Expanders", Digikey Description="IC I/O EXPANDER I2C 8B 16SOIC", Footprint Url=https://www.nxp.com/docs/en/package-information/SOT162-1.pdf, Height=2.65mm, Interface=I2C, Ipc Land Pattern Name=SOIC127P1032X265-16, Lead Free=Yes, Manufacturer Part Number=PCF8574T/3,518, Mouser Description="PCF8574 Series 2.5 - 6V Remote 8-bit I/O Expander for I2C-bus - SOIC-16", Number Of I/Os=8, Octopart=https://octopart.com/pcf8574t%2F3%2C518-nxp+semiconductors-10470852, RoHS=TRUE, Standoff Height=0.1mm, Temperature Range High=+85°C, Temperature Range Low=-40°C

## Via types
v1: diameter 1.27, hole 0, Top Layer to Bottom Layer, 77 vias

## Nets (pads, with @x,y where several pads share a name; then routed paths per layer and width w, separated by ;. In a path a pad name is that pad's centre, name@x,y a point inside that pad or via, vN(x,y) a via of type N, cw(c..) or ccw(c..) an arc to the next point about the centre after c; other vN are vias at no path point)
3.3V: C1.2 C3.1 MD1.2 R2.2 R3.2 U1.4 | length 112.2
  Top Layer w0.5: R2.2 30.145,40.25 v1(31.5,40.25) 41,40.25 46,45.25 69.95,45.25 70.75,46.05 70.75,54 ; 76.362,63.846 75.25,64.958 75.25,65.171 70.012,65.488 67.868,65.618 68.875,66.625 71.592,69.342 R3.2 ; 77.5,63.846 81.241,63.846 81.534,63.553 C3.1
  Top Layer w0.8: U1.4@68.875,66.625 70.012,65.488 70.75,64.75 70.75,54 72.25,52.5 C1.2@76.504,52.5 ; 76.362,63.973 77.5,63.973 ; C1.2 77.433,52.502 80.098,49.837 MD1.2
5V: C4.1 C6.2 C7.2 D1.1 DS1.2 DS1.17 L1.2 Motor.2 R1.2 R4.1 U1.3 U2.4 U3.16 | length 269.5
  Top Layer w0.5: R1.2 33.542,29.25 34.292,30 v1(34.5,30) ; v1(42.75,32) 42.874,32.124 45.596,32.124 R4.1
  Top Layer w0.8: U3.16 71.551,31.369 C7.2 75.616,28.884 95.463,9.037 DS1.17
  Top Layer w1: Motor.2 12.333,3.953 D1.1 ; v1(51.75,52.5) 51.802,52.552 52.052,52.552 53.094,53.594 ; L1.2 51.892,54.796 53.094,53.594 ; C6.2@56.037,53.594 53.094,53.594 ; C6.2@56.337,53.594 C4.1 64.507,53.839 66.339,53.839 68.447,55.947 U1.3
  Bottom Layer w0.5: 34.5,10.5 35.905,9.095 36.84,9.095 DS1.2 DS1.17 ; v1@34.552,30.552 36,32 v1(42.75,32)
  Bottom Layer w1: D1.1 28.943,2.443 34.5,8 34.5,10.5 v1(34.5,30) 34.5,36.75 37.187,39.438 45.438,39.438 51.75,45.75 51.75,49.25 ; U2.4 30.175,50.825 33.5,47.5 44.9,47.5 ; 45,47.5 45.25,47.5 50,47.5 ; 50.071,47.571 51.75,49.25 ; v1(51.75,52.5) 51.75,49.25
36V: "Power Supply.2" C5.2 U2.1 | length 39.2
  Top Layer w1: 8.292,14.519 8.282,14.529 7.332,14.529 6.009,15.852 C5.2 6.009,33.804 U2.1
GND: "HeatSink 2.1" "Power Supply.1" C1.1 C2.2 C3.2 C4.2 C5.1 C6.1 C7.1 D2.2 DS1.1 DS1.7 DS1.8 DS1.9 DS1.10 MD1.1 MD1.15 MD1.20 MD1.34 MD1.38 MD1.39 Q1.3 Q2.3 Q3.2 R4.3 SW1.1 SW1.2 U1.1 U2.3 U2.5 U3.1 U3.2 U3.3 U3.8 | length 22
  Top Layer w0.8: MD1.39@87.978,43.607 87.978,45.442 MD1.39@89.813,45.442 ; MD1.39@87.978,43.607 87.978,41.772 MD1.39@89.813,41.772 ; MD1.39@87.978,43.607 MD1.39@89.813,43.607 ; MD1.39@89.813,41.772 91.648,41.772 MD1.39@91.648,43.607 ; MD1.39@89.813,41.772 MD1.39@89.813,43.607 ; MD1.39@89.813,43.607 MD1.39@89.813,45.442 ; MD1.39@89.813,43.607 MD1.39@91.648,43.607 ; MD1.39@89.813,45.442 91.648,45.442 MD1.39@91.648,43.607
  other v1: 92.75,3.75 41.75,4 71.25,4.25 18,4.75 22.75,4.75 14,7.25 27.5,10 83.5,11.75 50.75,12.25 67.5,13.25 15.75,17 51,17.75 59.5,18 27.5,19.25 11.5,23 42.75,23.25 75.75,24 87.5,24.25 96,24.5 58.5,26 18.25,26.5 71.25,27 39.75,27.5 45.75,27.5 99.5,28 83.5,28.25 92,28.25 67,35.5 44.25,35.75 39.75,36 95,37.5 69,37.75 16.25,38 50.75,39.25 22.25,41.25 58.5,42 79,43.25 39.25,43.5 33.25,44 5.75,45.5 10.25,46.5 60,47.75 66.5,48 73.25,48.5 87.25,49.5 92.25,49.5 42,52.5 29.75,55.5 42.75,57.5 59.25,57.5 78.25,58.75 73.75,59 86.5,61.5 95.25,61.5 8.25,61.75 19.25,62 55.75,63 86.5,64.75 8.25,67.25 19,67.25 29.5,67.25 41.25,67.25
NetC2_1: C2.1 MD1.3 | length 5.6
  Top Layer w0.5: C2.1 77.049,48.387 82.133,48.387 MD1.3
NetD1_2: "HeatSink 1.1" "HeatSink 1.2" D1.2 Motor.1 Q1.4 | length 30.4
  Top Layer w1: Motor.1 13.535,11.323 D1.2 18.829,11.323 Q1.4@22.238,14.732
  Top Layer w3: 22.538,8.358 Q1.4 22.538,21
NetD2_1: D2.1 L1.1 U2.2 | length 51.8
  Top Layer w0.5: L1.1@51.829,68.047 L1.1
  Top Layer w1: U2.2 20.73,54.98 27.75,62 45,62 48.336,58.664 ; D2.1 48.336,58.664 ; L1.1@51.829,68.047 48.336,64.554 48.336,58.664
NetDS1_3: DS1.3 R4.2 | length 32.9
  Bottom Layer w0.5: DS1.3 44.537,11.037 48.26,14.76 R4.2
NetDS1_4: DS1.4 U3.4 | length 43
  Top Layer w0.5: DS1.4 41.236,13.037 67.591,39.392 U3.4@67.591,40.749
NetDS1_5: DS1.5 U3.5 | length 40.8
  Top Layer w0.5: DS1.5 41.787,15.037 66.321,39.571 U3.5@66.321,40.749
NetDS1_6: DS1.6 U3.6 | length 38.7
  Top Layer w0.5: DS1.6 42.537,17.037 65.051,39.551 U3.6@65.051,40.749
NetDS1_11: DS1.11 U3.9 | length 48.4
  Top Layer w0.5: U3.9 62.561,22.189 v1(64,20.75)
  Bottom Layer w0.5: v1(64,20.75) 64.208,20.75 64.495,21.037 DS1.11
NetDS1_12: DS1.12 U3.10 | length 47.2
  Top Layer w0.5: U3.10 63.881,23.369 v1(68.5,18.75)
  Bottom Layer w0.5: v1(68.5,18.75) 68.643,18.893 100.255,18.893 DS1.12
NetDS1_13: DS1.13 U3.11 | length 46
  Top Layer w0.5: U3.11 65.151,24.349 v1(72.5,17)
  Bottom Layer w0.5: v1(72.5,17) 72.537,17.037 DS1.13
NetDS1_14: DS1.14 U3.12 | length 44.8
  Top Layer w0.5: U3.12 66.421,25.579 v1(77,15)
  Bottom Layer w0.5: v1(77,15) 77.019,15.019 100.38,15.019 DS1.14
NetDS1_18: DS1.18 Q3.3 | length 75
  Top Layer w0.5: v1(53.5,32.25) 53.492,32.258 53.492,36.642 54.442,37.592 Q3.3 ; v1(53.75,15) 53.75,13.75 60.463,7.037 DS1.18
  Bottom Layer w0.5: v1(53.5,32.25) 53.625,32.125 53.625,15.125 v1(53.75,15)
NetMD1_13: MD1.13 Q2.2 | length 61.3
  Top Layer w0.5: Q2.2 29.369,36.195 31.5,38.326 v1(31.5,38.5) 31.708,38.5 32.458,39.25 41.25,39.25 46.25,44.25 74.5,44.25 76.5,42.25 76.5,40.234 80.867,35.867 MD1.13
NetMD1_23: MD1.23 R3.1 SW1.3 SW1.4 | length 58.2
  Top Layer w0.5: R3.1 87.431,69.179 SW1.4 SW1.3 98.971,67.779 102.5,64.25 102.5,34.75 99,31.25 96,31.25 95.258,31.992 MD1.23
NetMD1_33: MD1.33 U3.15 | length 35.3
  Top Layer w0.5: U3.15@70.195,32.085 70.195,33.695 71.25,34.75 v1(75.5,34.75) ; v1(96.25,44.5) 96.507,44.757 MD1.33
  Bottom Layer w0.5: v1(75.5,34.75) 86.5,34.75 v1(96.25,44.5)
NetMD1_36: MD1.36 U3.14 | length 38.2
  Top Layer w0.5: U3.14@68.935,32.075 68.935,33.685 72.25,37 v1(75.5,37) ; v1(96.25,47.5) 97.317,48.567 MD1.36
  Bottom Layer w0.5: v1(75.5,37) 85.75,37 v1(96.25,47.5)
NetQ1_1: Q1.1 Q2.4 R1.1 | length 30.3
  Top Layer w0.5: Q2.4 20.919,31.831 23.5,29.25 23.5,29.231 24.129,28.602 24.148,28.602 25.638,27.112 27.75,25 30.5,25 32.75,22.75 32.75,14.75 30.452,12.452 Q1.1
NetQ2_1: Q2.1 R2.1 | length 7.8
  Top Layer w0.5: R2.1 26.869,34.381 27.594,33.656 Q2.1@29.12,33.656
NetQ3_1: Q3.1 U3.7 | length 8.5
  Top Layer w0.5: Q3.1 57.769,36.515 60.54,36.515 63.781,39.756 U3.7@63.781,40.749
pads on no net: DS1.15 DS1.16 MD1.4 MD1.5 MD1.6 MD1.7 MD1.8 MD1.9 MD1.10 MD1.11 MD1.12 MD1.14 MD1.16 MD1.17 MD1.18 MD1.19 MD1.21 MD1.22 MD1.24 MD1.25 MD1.26 MD1.27 MD1.28 MD1.29 MD1.30 MD1.31 MD1.32 MD1.35 MD1.37 U3.13

## Polygon pours and split planes (outlines as drawn)
GND on Bottom Layer "GND_L02_P001" (solid, pour order 1): 0,0 104,0 104,72.5 0,72.5
GND on Top Layer "GND_L01_P000" (solid, pour order 0): 81.407,72.5 81.424,72.517 89.789,72.5 104,72.5 104,0 0,0 0,72.5

## Other copper
Top Layer:
  rectangle net GND: 86.5,40.25 93.25,47
  rectangle net 3.3V: 59,61.75 78.75,71.5